# EAGLE board riffle-beta-0.1.6 (EAGLE 7.5.0)

Size 104.8 x 18.01 mm. Coordinates in mm from the lower left corner, seen from the top.
Outline: 22.91,18.01 22.96,18.01
Outline: 0,0 0,17.96 104.8,17.96 104.8,0 22.07,0 arc90 20.75,1.32 10.95,1.32 arc90 9.63,0 0,0
Copper layers (1*16): Top 0.0356mm / dielectric 1.5011mm / Bottom 0.0356mm
Design rules "LaenPCBOrder": minimum track width 6mil, minimum drill 13mil, track to track 6mil, track to pad 6mil, pad to pad 6mil, via to via 6mil, smd to smd 6mil, copper to edge 15mil, drill to drill 6mil, minimum pad ring 7mil, minimum via ring 7mil, stop-mask expansion 3mil, vias tented up to drill 0mil, thermal gap 10mil
Holes 3.2 mm at 70.13,9 22.13,9

## Footprints (pad centres in the part's own frame; a part is rotated, then mirrored left to right if it is on the bottom)
BATTCON_12MM_SMT = smd 2.4 x 4.3: P$1 0,11.96 | smd 2.4 x 4.2: P$2 0,-4.1 | hole 0.95: 0,7.5 | hole 1.25: 0,0
SOT-23 = smd 0.787 x 0.889: 1 0.025,-1.016; 2 -0.94,1.016; 3 0.991,1.016
0603-CAP = smd 1.1 x 1: 1 -0.85,0; 2 0.85,0
JST-PH-2-SMT-RA = smd 1 x 4.6: 1 1,-3.7; 2 -1,-3.7 | smd 1.6 x 3.4: NC1 -3.4,1.5; NC2 3.4,1.5
0603-LED = smd 0.8 x 0.9: MINUS -0.85,0; PLUS 0.85,0
SOD-123FL = smd 0.91 x 1.22: A 1.637,0; C -1.637,0
TQFP32-08 = smd 1.27 x 0.559: 1 -4.293,2.8; 2 -4.293,2; 3 -4.293,1.2; 4 -4.293,0.4; 5 -4.293,-0.4; 6 -4.293,-1.2; 7 -4.293,-2; 8 -4.293,-2.8; 17 4.293,-2.8; 18 4.293,-2; 19 4.293,-1.2; 20 4.293,-0.4; 21 4.293,0.4; 22 4.293,1.2; 23 4.293,2; 24 4.293,2.8 | smd 0.559 x 1.27: 9 -2.8,-4.293; 10 -2,-4.293; 11 -1.2,-4.293; 12 -0.4,-4.293; 13 0.4,-4.293; 14 1.2,-4.293; 15 2,-4.293; 16 2.8,-4.293; 25 2.8,4.293; 26 2,4.293; 27 1.2,4.293; 28 0.4,4.293; 29 -0.4,4.293; 30 -1.2,4.293; 31 -2,4.293; 32 -2.8,4.293
SO16 = smd 0.6 x 1.2: 1 -4.445,-2.8; 2 -3.175,-2.8; 3 -1.905,-2.8; 4 -0.635,-2.8; 5 0.635,-2.8; 6 1.905,-2.8; 7 3.175,-2.8; 8 4.445,-2.8; 9 4.445,2.8; 10 3.175,2.8; 11 1.905,2.8; 12 0.635,2.8; 13 -0.635,2.8; 14 -1.905,2.8; 15 -3.175,2.8; 16 -4.445,2.8
SOT89 = smd 0.58 x 1.2: 1 -1.5,-1.8; 2 0,-1.8; 3 1.5,-1.8 | smd 2 x 2: 4 0,1.3
SO-08 = smd 0.6 x 2.2: 1 -1.905,-2.6; 2 -0.635,-2.6; 3 0.635,-2.6; 4 1.905,-2.6; 5 1.905,2.6; 6 0.635,2.6; 7 -0.635,2.6; 8 -1.905,2.6
2X03 = drill 1.016 octagon: 1 -2.54,-1.27; 2 -2.54,1.27; 3 0,-1.27; 4 0,1.27; 5 2.54,-1.27; 6 2.54,1.27
AYZ0202 = smd 1 x 1.15: 1 -2.5,2.825; 2 0,2.825; 3 2.5,2.825; 4 -2.5,-2.825; 5 0,-2.825; 6 2.5,-2.825 | hole 0.85: 1.5,0; -1.5,0
MICROUSB-RIGHT = smd 0.4 x 1.35: 1 -1.3,1.27; 2 -0.65,1.27; 3 0,1.27; 4 0.65,1.27; 5 1.3,1.27 | smd 0.9 x 1.6: S1 -3.3,-1.4; S2 3.3,-1.4 | smd 1.6 x 1.4: S3 -3.2,1.27; S4 3.2,1.27 | smd 1.9 x 1.9: S5 -1.2,-1.405; S6 1.2,-1.405 | smd 0.9 x 1.6 bottom: S7 -3.3,-1.4; S8 3.3,-1.4
1X02 = drill 1.016 long: 1 -1.27,0; 2 1.27,0
1X04-SMD = smd 1 x 3: 1 -3.81,5; 2 -1.27,5; 3 1.27,5; 4 3.81,5 | hole 1.4: -2.54,0; 2.54,0
2X07 = drill 1.016 octagon: 1 -7.62,-1.27; 2 -7.62,1.27; 3 -5.08,-1.27; 4 -5.08,1.27; 5 -2.54,-1.27; 6 -2.54,1.27; 7 0,-1.27; 8 0,1.27; 9 2.54,-1.27; 10 2.54,1.27; 11 5.08,-1.27; 12 5.08,1.27; 13 7.62,-1.27; 14 7.62,1.27
R1206 = smd 1.6 x 1.803: 1 -1.422,0; 2 1.422,0
0603-NO = smd 1.1 x 1: 1 -0.85,0; 2 0.85,0
DS3231 = smd 0.762 x 2.286: 1 -4.445,-5.08; 2 -3.175,-5.08; 3 -1.905,-5.08; 4 -0.635,-5.08; 5 0.635,-5.08; 6 1.905,-5.08; 7 3.175,-5.08; 8 4.445,-5.08; 9 4.445,5.08; 10 3.175,5.08; 11 1.905,5.08; 12 0.635,5.08; 13 -0.635,5.08; 14 -1.905,5.08; 15 -3.175,5.08; 16 -4.445,5.08
SOT23-5 = smd 0.55 x 1.2: 1 -0.95,-1.3; 2 0,-1.3; 3 0.95,-1.3; 4 0.95,1.3; 5 -0.95,1.3
DM3D = smd 0.7 x 1.75: CD/DAT3 8.15,0.45; CLK 4.85,0.45; CMD 7.05,0.45; DAT0 2.65,0.45; DAT1 1.6,0.45; DAT2 9.25,0.45 | smd 0.8 x 1.5: GND1 0.05,8.15 | smd 0.8 x 1.4: GND2 11.95,8.8 | smd 1.4 x 1.5: GND3 11.65,0.55 | smd 1.3 x 1.5: GND4 0.35,0.55 | smd 1 x 1.55: SW_A 11.6,11.25 | smd 1.4 x 1: SW_B 0.35,9.65 | smd 0.7 x 2.032: VDD 5.95,0.45; VSS 3.75,0.45
RESONATOR-SMD = smd 0.7 x 1.7: 1 -1.2,0; 2 0,0; 3 1.2,0

## Placement (x,y rotation side)
BAT  CR1220  [BATTCON_12MM_SMT]  47.1,8.57 70 top
BATTPOWER  FDN340P  [SOT-23]  63.12,5.14 180 top
C1  10uF  [0603-CAP]  10.2,16.92 0 top
C2  0.1uF  [0603-CAP]  13.48,16.89 180 top
C3  0.1uF  [0603-CAP]  40.37,1.31 0 top
C4  10uF  [0603-CAP]  17.24,10.1 180 top
C6  10uF  [0603-CAP]  1.52,-15.65 0 top  (outside the outline)
C7  0.1uF  [0603-CAP]  51.03,1.17 180 top
C8  0.1uF  [0603-CAP]  80.53,16.62 180 top
C9  0.1uF  [0603-CAP]  80.57,15.01 180 top
C10  0.1uF  [0603-CAP]  70.86,1.44 180 top
C11  0.1uF  [0603-CAP]  67.19,1.36 0 top
C13  10uF  [0603-CAP]  22.81,13.36 180 top
C14  10uF  [0603-CAP]  44.04,1.22 180 top
CN2  [JST-PH-2-SMT-RA]  3.71,13.31 90 top
CNL  [JST-PH-2-SMT-RA]  3.72,4.7 90 top
D1  LED0603  [0603-LED]  17.15,8.76 0 top
D2  LED0603  [0603-LED]  69.37,3.38 180 top
D3  SCHOTTKY MBR120VLSFT3G  [SOD-123FL]  2.18,-9.58 0 top  (outside the outline)
D4  SCHOTTKY MBR120VLSFT3G  [SOD-123FL]  2.18,-18.85 0 top  (outside the outline)
IC1  ATMEGA328P  [TQFP32-08]  79.09,7.72 135 top
IC3  CH340G  [SO16]  29.63,5.17 90 top
IC4  MCP1700-33  [SOT89]  35.99,2.54 270 top
IC5  24AA128SN  [SO-08]  57.02,2.98 270 top
IC6  MCP1700-33  [SOT89]  17.73,13.49 0 top
ISP  [2X03]  71.1,15.2 180 top
J1  AYZ0202  [AYZ0202]  28.93,14.1 180 top
J2  [MICROUSB-RIGHT]  15.75,4.17 0 top
JP1  [1X02]  13.04,12.26 270 top
JP3  [1X04-SMD]  42.39,9 270 bottom
JP5  [2X07]  102.23,9.01 270 top
L1  500mA  [R1206]  9.75,8.94 90 top
R1  10K  [0603-NO]  16.75,16.87 180 top
R2  4.7K  [0603-NO]  17.32,7.39 180 top
R3  10K  [0603-NO]  51.09,2.55 180 top
R4  10K  [0603-NO]  66.37,4.5 90 top
R5  10K  [0603-NO]  63.35,2.66 0 top
R6  10K  [0603-NO]  63.2,1.22 180 top
R7  10K  [0603-NO]  98.65,9.05 270 top
R8  10K  [0603-NO]  98.4,15.49 270 top
R9  10K  [0603-NO]  50.91,15.5 180 top
R10  10K  [0603-NO]  50.88,17.03 180 top
REMOTE  FDN340P  [SOT-23]  83.98,15.91 180 top
RTC-DS3231  DS3231  [DS3231]  60.27,12.21 270 top
SDPWER  FDN340P  [SOT-23]  77.23,15.95 180 top
U1  MCP73831T-2ACI/OT  [SOT23-5]  22.68,16.03 90 top
U$1  MICROSD-HRS_DM3D  [DM3D]  97.6,12.78 180 top
X2  12MHz  [RESONATOR-SMD]  34.59,7.33 90 top
X3  16 MHz  [RESONATOR-SMD]  74.66,2.55 135 top

## Library data of the parts
BAT IC3 J1 X2 = SparkFunNew
BATTPOWER REMOTE SDPWER = zetex; OC_FARNELL: unknown; OC_NEWARK: unknown
C1-C4 C6-C11 C13 C14 JP3 X3 = SparkFun
CN2 CNL D3 D4 IC4 IC6 L1 = adafruit
D1 D2 = LowPowerLab
IC1 = atmel; MPN: ATMEGA8-16AU; OC_FARNELL: 9171371; OC_NEWARK: 73M8863
IC5 = microchip; MF: MICROCHIP; MPN: 24AA128-I/SN; OC_FARNELL: unknown; OC_NEWARK: 92C6842
ISP JP1 JP5 = pinhead
J2 = MF_Connectors
R1-R10 U1 = microbuilder
RTC-DS3231 = _lh-library
U$1 = hrs_DM3D-SF

## Nets
A0: IC1.23 JP5.13
A1: IC1.24 JP5.12
A2: IC1.25 JP5.10
A3: IC1.26 R5.2 R6.1
AREF: C10.1 IC1.20
D2: IC1.32 JP5.7
D3: IC1.1 JP5.5
D4: BATTPOWER.3 IC1.2
D5/RTC: IC1.9 JP3.4 RTC-DS3231.3
D6: IC1.10 SDPWER.3
D7: IC1.11 U$1.CD/DAT3
D8: IC1.12 REMOTE.3
D9: IC1.13 R4.2
D10: IC1.14 JP5.2
D+: IC3.5 J2.3
D-: IC3.6 J2.2
GND: BAT.P$1 C1.1 C2.2 C4.2 C6.2 C7.1 C8.2 C9.1 C10.2 C11.1 C13.2 C14.2 CN2.2 CNL.2 D2.MINUS IC1.3 IC1.5 IC1.21 IC3.1 IC4.1 IC5.1 IC5.2 IC5.3 IC5.4 IC5.7 IC6.1 ISP.6 J2.5 JP1.2 JP3.3 JP5.1 R2.1 R5.1 RTC-DS3231.5 RTC-DS3231.6 RTC-DS3231.7 RTC-DS3231.8 RTC-DS3231.9 RTC-DS3231.10 RTC-DS3231.11 RTC-DS3231.12 RTC-DS3231.13 U1.2 U$1.GND1 U$1.GND2 U$1.GND3 U$1.GND4 U$1.SW_A U$1.SW_B U$1.VSS X2.2 X3.2
MISO: IC1.16 ISP.1 JP5.4 U$1.DAT0
MOSI: IC1.15 ISP.4 JP5.6 U$1.CMD
N$1: C13.1 IC4.2 J1.2
N$2: IC1.7 X3.1
N$3: IC1.8 X3.3
N$4: C9.2 R7.1 R8.2 SDPWER.1 U$1.VDD
N$5: D1.MINUS U1.1
N$6: R2.2 U1.5
N$7: C8.1 JP5.3 REMOTE.1
N$8: C2.1 IC3.4 IC3.16 IC6.3
N$9: J2.1 L1.1
N$11: IC3.7 X2.1
N$13: IC3.8 X2.3
N$15: BATTPOWER.1 C7.2 R6.2
N$16: R7.2 U$1.DAT1
N$17: D2.PLUS R4.1
N$18: R8.1 U$1.DAT2
N$19: D1.PLUS R1.1
RESET: C3.1 IC1.29 ISP.5 R3.1
RST: C3.2 IC3.14
RTC_BATT: BAT.P$2 RTC-DS3231.14
RXD: IC1.30 IC3.2 JP3.2
SCK: IC1.17 ISP.3 JP5.8 U$1.CLK
SCL: IC1.28 IC5.6 JP5.11 R9.1 RTC-DS3231.16
SDA: IC1.27 IC5.5 JP5.9 R10.1 RTC-DS3231.15
SLD: J2.S1 J2.S2 J2.S3 J2.S4 J2.S5 J2.S6 J2.S7 J2.S8
TXD: IC1.31 IC3.3 JP3.1
VBAT [vcc]: BATTPOWER.2 C6.1 CNL.1 D4.A JP5.14 U1.3
VBUS [vcc]: C1.2 C4.1 D3.A IC6.2 ISP.2 L1.2 R1.2 U1.4
VCC: C11.2 C14.1 IC1.4 IC1.6 IC1.18 IC4.3 IC5.8 R3.2 R9.2 R10.2 REMOTE.2 RTC-DS3231.2 SDPWER.2
VDD: D3.C D4.C J1.3
VGEN1: CN2.1 J1.1 JP1.1

## Tracks (layer width: path | path; a pad name or v marks a point on that pad's centre or on a via)
A0  (1 unrouted)
A1  (1 unrouted)
A2  (1 unrouted)
A3  (2 unrouted)
AREF  (1 unrouted)
D2  (1 unrouted)
D3  (1 unrouted)
D4  (1 unrouted)
D5/RTC  (2 unrouted)
D6  (1 unrouted)
D7  (1 unrouted)
D8  (1 unrouted)
D9  (1 unrouted)
D10  (1 unrouted)
D+  (1 unrouted)
D-  (1 unrouted)
GND  (51 unrouted)
MISO  (3 unrouted)
MOSI  (3 unrouted)
N$1  (2 unrouted)
N$2  (1 unrouted)
N$3  (1 unrouted)
N$4  (4 unrouted)
N$5  (1 unrouted)
N$6  (1 unrouted)
N$7  (2 unrouted)
N$8  (3 unrouted)
N$9  (1 unrouted)
N$11  (1 unrouted)
N$13  (1 unrouted)
N$15  (2 unrouted)
N$16  (1 unrouted)
N$17  (1 unrouted)
N$18  (1 unrouted)
N$19  (1 unrouted)
RESET  (3 unrouted)
RST  (1 unrouted)
RTC_BATT  (1 unrouted)
RXD  (2 unrouted)
SCK  (3 unrouted)
SCL  (4 unrouted)
SDA  (4 unrouted)
SLD  (7 unrouted)
TXD  (2 unrouted)
VBAT  (5 unrouted)
VBUS  (7 unrouted)
VCC  (12 unrouted)
VDD  (2 unrouted)
VGEN1  (2 unrouted)

## Text on the board
tPlace: ON | RIFFLE | IC2 | + | v0.1.4 | - | OFF | GND | VBUS | publiclab.org/riffle
bPlace: General | Riffle Beta 0.1.0 | TXD | RXD | publiclab.org/wiki/riffle | 3.7-6V | GND | CERN OHL v1.2 | Lithium | D5/RTC | 3.7V